# Altium PCB PCB2.PcbDoc
Units mil, origin at the board's own origin, x right, y up, seen from the top; angles counter-clockwise.
Board outline 6000 x 4000 mil, 6 copper layers (Top Layer, Layer 1, Layer 2, Layer 3, Layer 4, Bottom Layer), stack 32.112 mil thick; 144 components, 95 nets, 616 pads, 26 vias.
Unrouted connection lines stored in the file: 353.
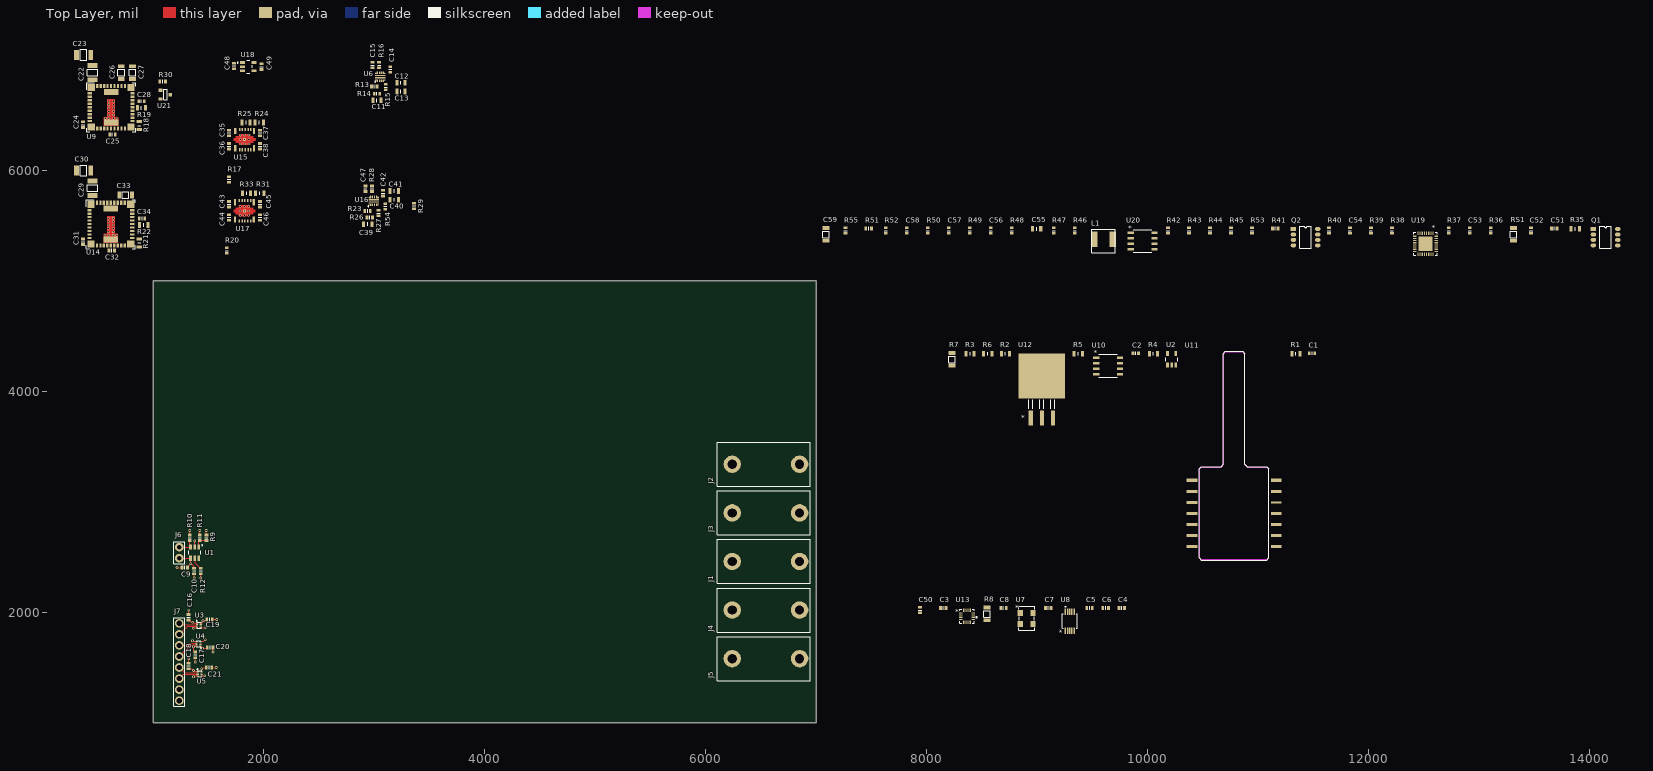
[diagram p0: Top Layer view]
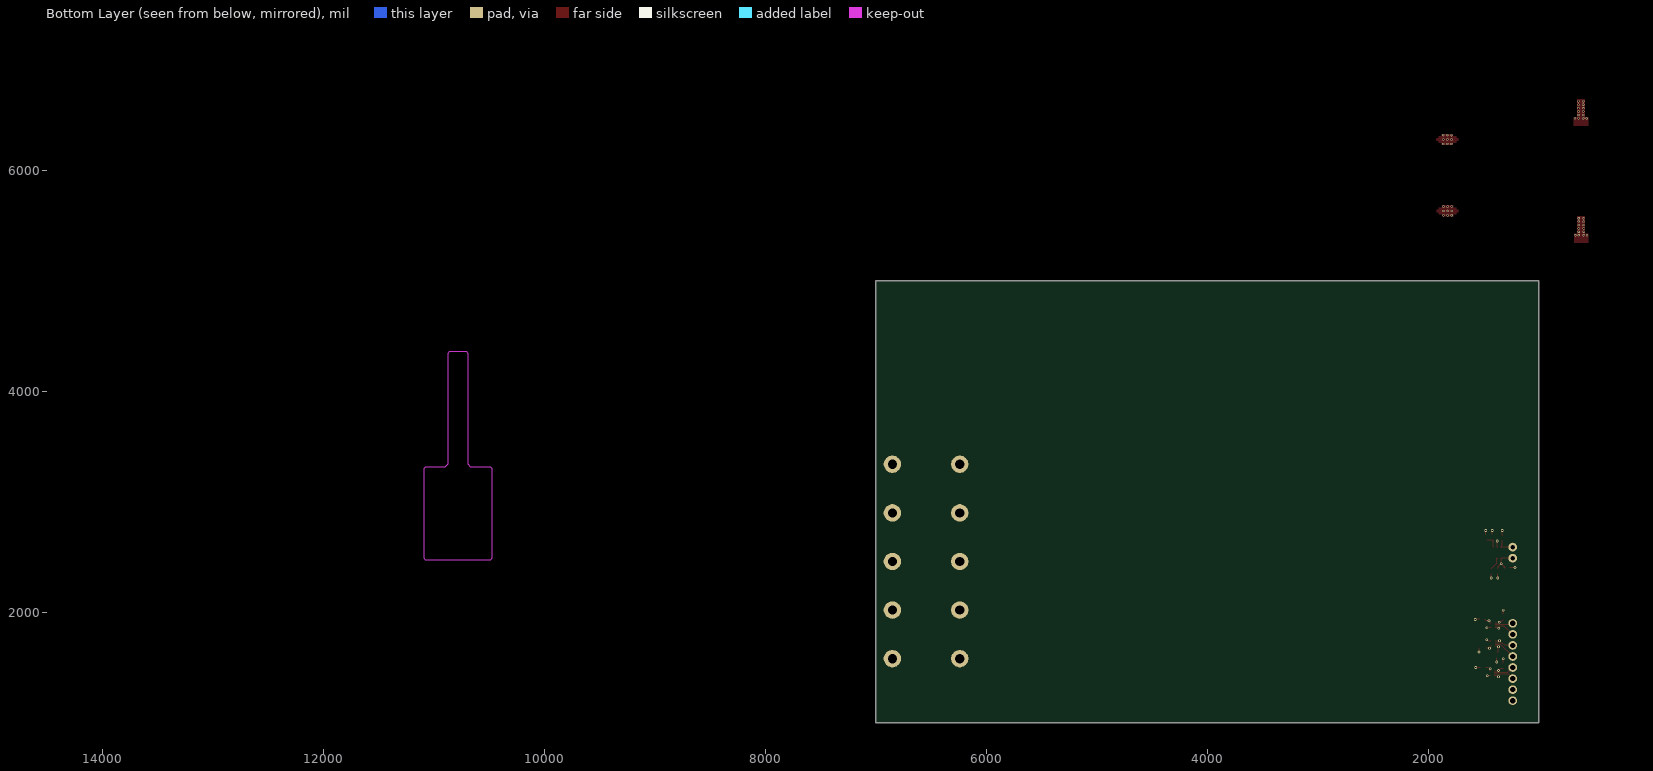
[diagram p1: Bottom Layer view, seen from below]
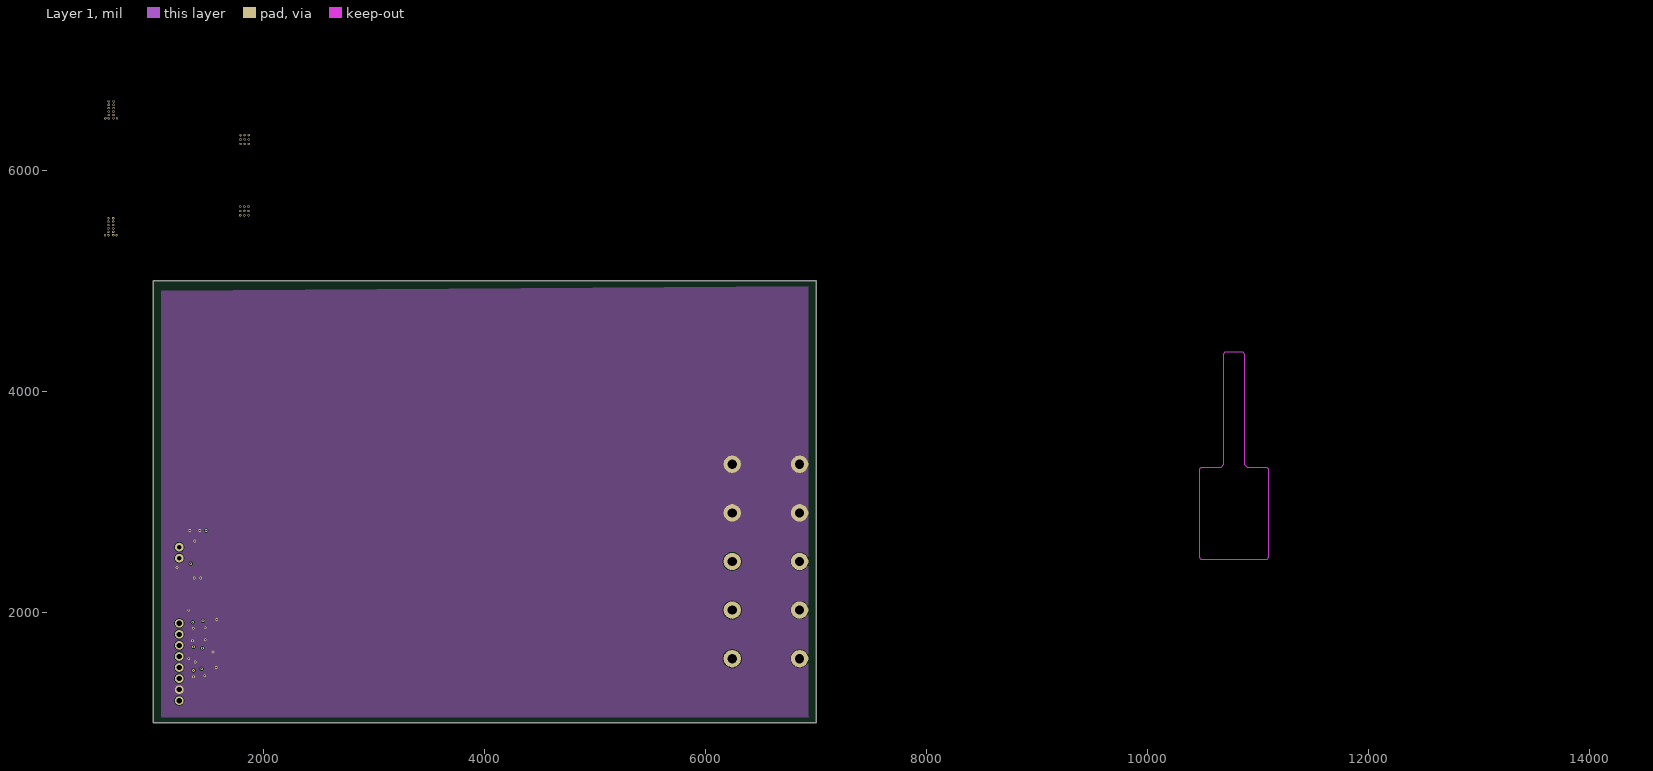
[diagram p2: Layer 1]
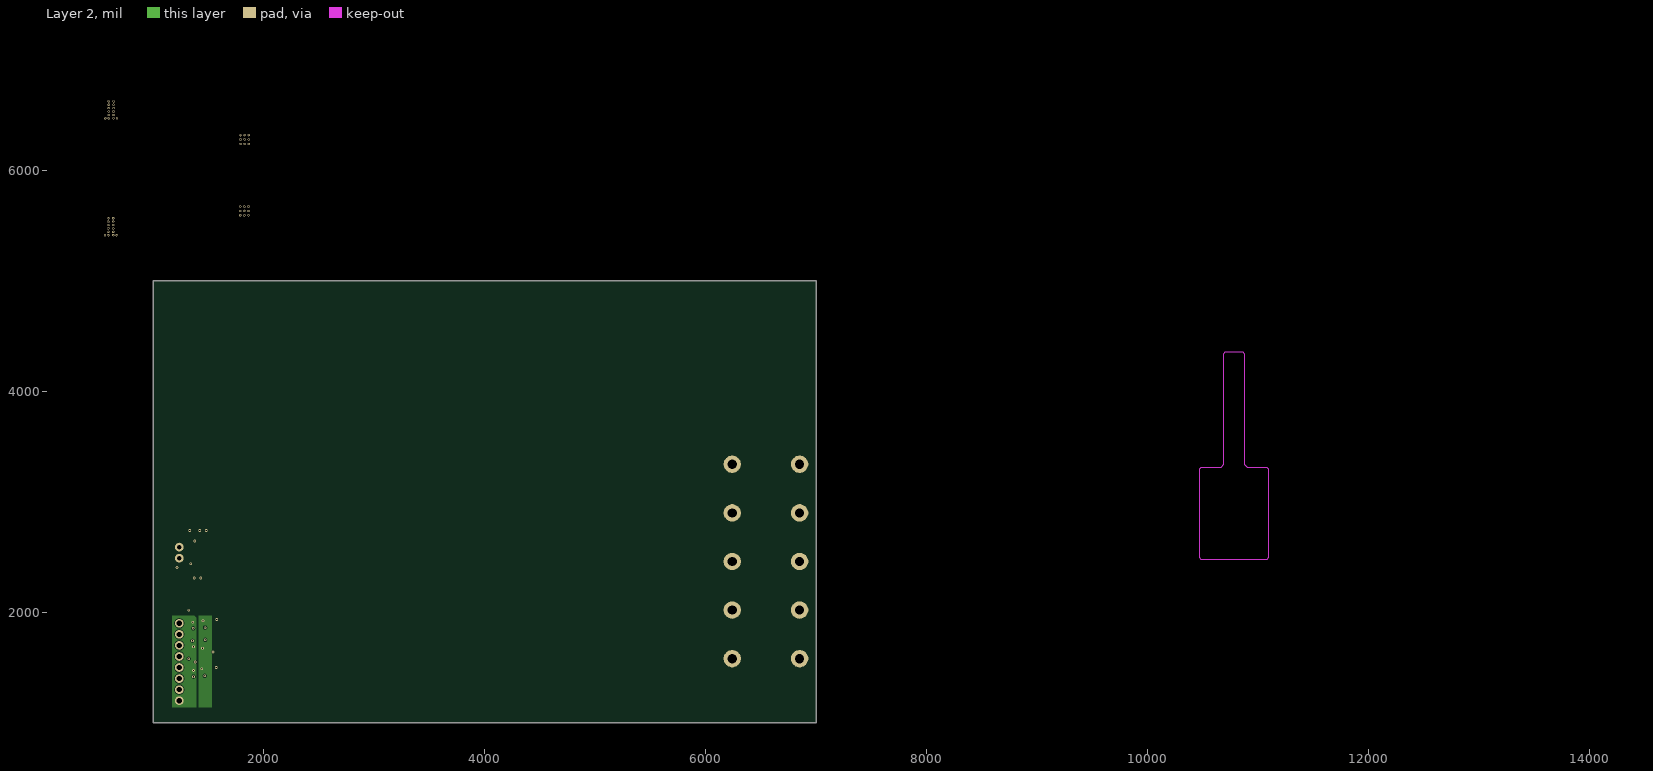
[diagram p3: Layer 2]
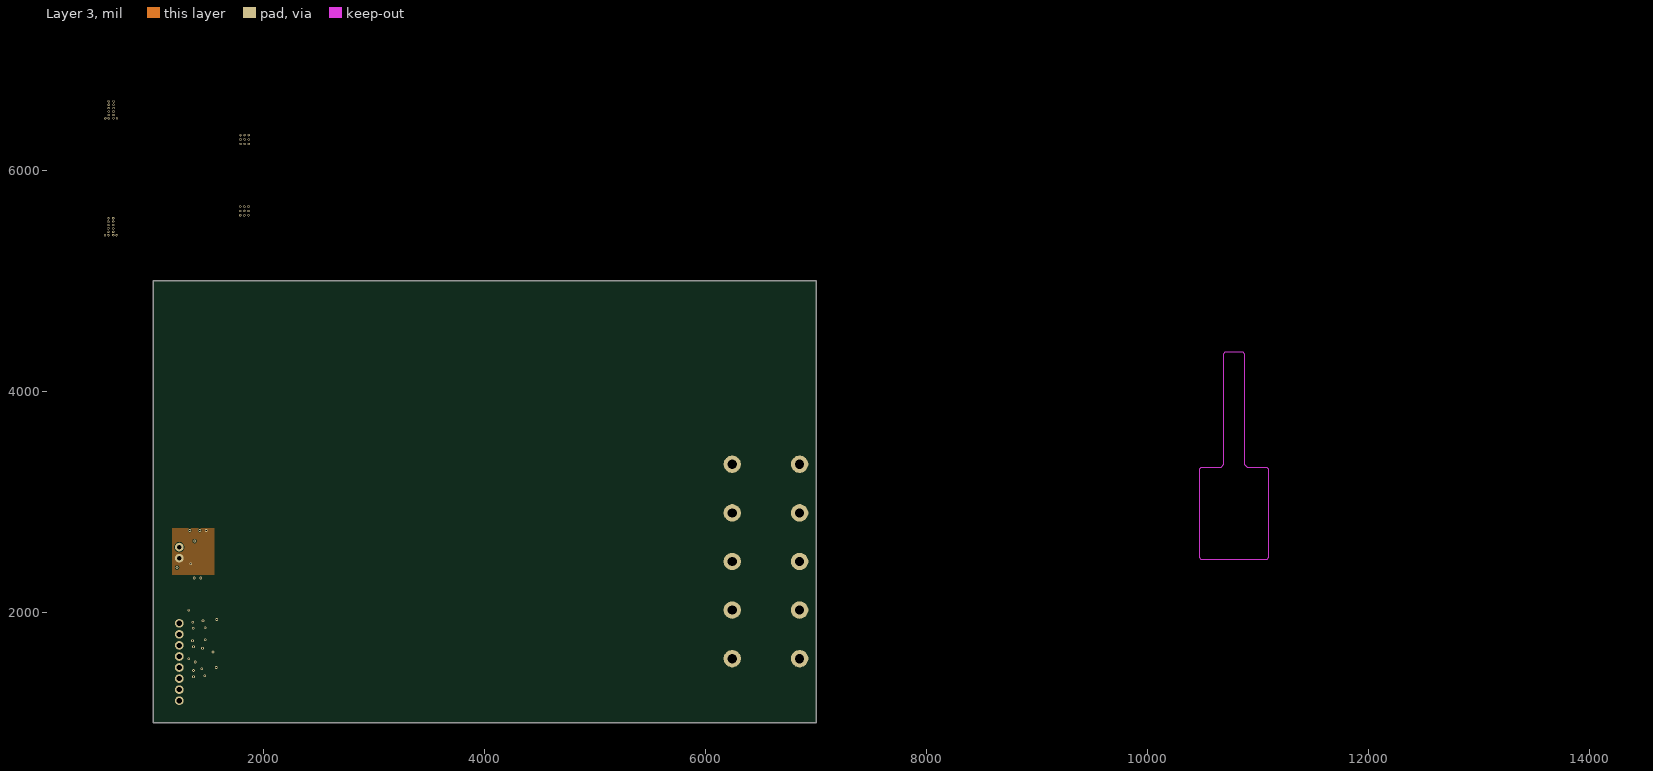
[diagram p4: Layer 3]

## Layer stack, top to bottom
Top Solder: solder mask 0.4, Solder Resist, Dk 3.5
Top Layer: signal copper 1.4
Dielectric 1: prepreg 2.8, PP-006, Dk 4.1
Layer 1: signal copper 1.378
Dielectric 2: prepreg 2.8, PP-006, Dk 4.1
Layer 2: signal copper 1.378
Dielectric 3: dielectric 12.6, FR-4, Dk 4.8
Layer 3: signal copper 1.378
Dielectric 4: prepreg 2.8, PP-006, Dk 4.1
Layer 4: signal copper 1.378
Dielectric 5: prepreg 2.8, PP-006, Dk 4.1
Bottom Layer: signal copper 1.4
Bottom Solder: solder mask 0.4, Solder Resist, Dk 3.5

## Board outline
1000,1000 7000,1000 7000,5000 1000,5000

## Design rules (kind name [scope] priority, off if disabled: settings)
Clearance [All] p1: gap=6 ignorepadtopadclearanceinfootprint=TRUE
HoleSize [All] p1: absolutevalues=TRUE maxlimit=100 minlimit=11.81 maxpercent=80.000 minpercent=20.000
PolygonConnect [All] p1: connectstyle=Direct reliefconductorwidth=10 reliefentries=4 polygonreliefangle="90 Angle" airgapwidth=10
RoomDefinition Connectors [InComponentClass('Connectors')] p1: confinementstyle=ConfineIn formatcopy=TRUE lockcomponents=FALSE outline 725.12,670 7125.12,670 7125.12,3640 725.12,3640
RoomDefinition Power [InComponentClass('Power')] p2: confinementstyle=ConfineIn formatcopy=TRUE lockcomponents=FALSE outline 39.53,5153.23 3639.53,5153.23 3639.53,7298.23 39.53,7298.23
RoomDefinition TECController [InComponentClass('TECController')] p3: confinementstyle=ConfineIn formatcopy=TRUE lockcomponents=FALSE outline 7045,5190 14290,5190 14290,5590 7045,5590
RoomDefinition LaserDiode [InComponentClass('LaserDiode')] p4: confinementstyle=ConfineIn formatcopy=TRUE lockcomponents=FALSE outline 8182.6,2300 11537.6,2300 11537.6,4460 8182.6,4460
RoomDefinition Control [InComponentClass('Control')] p5: confinementstyle=ConfineIn formatcopy=TRUE lockcomponents=FALSE outline 7910,1770 9825,1770 9825,2155 7910,2155
RoutingVias [All] p1: holewidth=12 width=24 viastyle="Through Hole" minholewidth=12 minwidth=24 maxholewidth=50 maxwidth=100 useviatemplates=TRUE viatemplateguid#1={191AAEB9-C5C8-47EE-9A1E-635FF2006958} viatemplatename#1=v61h30
SolderMaskExpansion [All] p1: expansion=4 istentingtop=FALSE
Width [All] p1: maxlimit=100 minlimit=6 preferedwidth=10
29 further rules are at their usual default settings.

## Classes and differential pairs
component class TECController: C51 C52 C53 C54 C55 C56 C57 C58 C59 L1 Q1 Q2 R35 R36 R37 R38 R39 R40 R41 R42 R43 R44 R45 R46 R47 R48 R49 R50 R51 R52 R53 R55 RS1 U19 U20
component class Power: C11 C12 C13 C14 C15 C22 C23 C24 C25 C26 C27 C28 C29 C30 C31 C32 C33 C34 C35 C36 C37 C38 C39 C40 C41 C42 C43 C44 C45 C46 C47 C48 C49 R13 R14 R15 R16 R17 R18 R19 R20 R21 R22 R23 R24 R25 R26 R27 R28 R29 R30 R31 R33 R54 U6 U9 U14 U15 U16 U17 U18 U21
component class LaserDiode: C1 C2 R1 R2 R3 R4 R5 R6 R7 U2 U10 U11 U12
component class Control: C3 C4 C5 C6 C7 C8 C50 R8 U7 U8 U13
component class Connectors: C9 C10 C16 C17 C18 C19 C20 C21 J1 J2 J3 J4 J5 J6 J7 R9 R10 R11 R12 U1 U3 U4 U5

## Components (designator, comment, footprint, x,y, rotation, side; value= is the part's Value field where it differs from the comment)
C1 "120pF" "0603 B" 11487.6,4345 r0 top
C2 "47pF" "0603 B" 9892.6,4345 r0 top
C3 "0.1uF" "0603 B" 8150,2040 r0 top
C4 "10uF" "0603 B" 9765,2040 r0 top
C5 "0.1uF" "0603 B" 9475,2040 r0 top
C6 "0.01uF" "0603 B" 9620,2040 r0 top
C7 "0.1uF" "0603 B" 9100,2040 r0 top
C8 "0.1uF" "0603 B" 8695,2040 r0 top
C9 "1uF" "0603 B" 1285.12,2405 r0 top
C10 "1uF" "0603 B" 1370.12,2375 r90 top
C11 "1uF" "0805 B" 3024.53,6633.23 r180 top
C12 "4.7uF" "0805 B" 3241.93,6793.23 r0 top
C13 "4.7uF" "0805 B" 3241.93,6713.23 r0 top
C14 "3.3nF" "0603 B" 3144.53,6913.23 r270 top
C15 "1nF" "0603 B" 2984.53,6953.23 r270 top
C16 "1uF" "0603 B" 1320.12,1955 r270 top
C17 "1uF" "0603 B" 1380.12,1615 r90 top
C18 "1uF" "0603 B" 1320.12,1515 r270 top
C19 "1uF" "0603 B" 1510.12,1935 r180 top
C20 "1uF" "0603 B" 1515,1680 r180 top
C21 "1uF" "0603 B" 1505,1500 r180 top
C22 "22uF" 1210 450,6885 r270 top
C23 "22uF" 1210 370,7045 r180 top
C24 "100nF" "0603 B" 364.53,6413.23 r270 top
C25 "100nF" "0603 B" 630,6325 r180 top
C26 "100uF" "1206 B" 710,6885 r270 top
C27 "100uF" "1206 B" 810,6885 r270 top
C28 "33nF" "0603 B" 893.31,6625 r180 top
C29 "22uF" 1210 449.53,5838.23 r270 top
C30 "22uF" 1210 369.53,5998.23 r180 top
C31 "100nF" "0603 B" 364.53,5353.23 r270 top
C32 "100nF" "0603 B" 624.53,5273.23 r180 top
C33 "100uF" "1206 B" 749.53,5778.23 r180 top
C34 "33nF" "0603 B" 898.31,5565 r180 top
C35 "10uF" "0603 B" 1684.53,6338.23 r90 top
C36 "10uF" "0603 B" 1684.53,6218.23 r270 top
C37 "47uF" "0603 B" 1964.53,6338.23 r90 top
C38 "47uF" "0603 B" 1964.53,6218.23 r270 top
C39 "1uF" "0805 B" 2941.93,5513.23 r180 top
C40 "4.7uF" "0805 B" 3181.93,5733.23 r0 top
C41 "4.7uF" "0805 B" 3181.93,5813.23 r0 top
C42 "18nF" "0603 B" 3079.33,5793.23 r270 top
C43 "10uF" "0603 B" 1684.53,5693.23 r90 top
C44 "10uF" "0603 B" 1684.53,5573.23 r270 top
C45 "47uF" "0603 B" 1964.53,5693.23 r90 top
C46 "47uF" "0603 B" 1964.53,5573.23 r270 top
C47 "1nF" "0603 B" 2919.33,5833.23 r270 top
C48 "1uF" "0603 B" 1730,6945 r90 top
C49 "1uF" "0603 B" 1979.53,6938.23 r90 top
C50 "0.1uF" "0603 B" 7940,2020 r90 top
C51 "100nF" "0603 B" 13680,5475 r0 top
C52 "100nF" "0603 B" 13470,5455 r90 top
C53 "100nF" "0603 B" 12915,5455 r90 top
C54 "100nF" "0603 B" 11830,5455 r90 top
C55 "47uF" "0805 B" 8995,5470 r0 top
C56 "4.7nF" "0603 B" 8580,5455 r90 top
C57 "100pF" "0603 B" 8200,5455 r90 top
C58 "100nF" "0603 B" 7820,5455 r90 top
C59 "68uF" "1206 B" 7090,5420 r90 top
J1 "24.243.1" "BANANA RD" 6545.12,2460 r0 top
J2 "24.243.2" "BANANA BK" 6545.12,3340 r0 top
J3 "24.243.2" "BANANA BK" 6545.12,2900 r0 top
J4 "24.243.3" "BANANA YL" 6545.12,2020 r0 top
J5 "24.243.5" "BANANA BU" 6545.12,1580 r0 top
J6 "SIL02" SIL02 1235.12,2540 r270 top
J7 "SIL08" SIL08 1235.12,1550 r90 top
L1 "3.3uH" SRP0520 9600,5360 r0 top
Q1 "FDS8960C" SO-8 14145,5395 r0 top
Q2 "FDS8960C" SO-8 11430,5395 r0 top
R1 "124" 0805 11342.6,4340 r0 top
R2 "62K" 0805 8712.6,4340 r0 top
R3 "3.9K" 0805 8392.6,4340 r0 top
R4 "1k" 0805 10052.6,4340 r0 top
R5 "10" 0805 9372.6,4340 r0 top
R6 "10k" 0805 8552.6,4340 r0 top
R7 "0.025" 1206 8227.6,4290 r90 top
R8 "22" 1206 8545,1985 r90 top
R9 "18k" 0603 1480.06,2674.94 r90 top
R10 "18k" 0603 1330.12,2675 r270 top
R11 "174k" 0603 1420.06,2674.94 r90 top
R12 "18k" 0603 1430.12,2375 r90 top
R13 "174k" 0603 2999.53,6758.23 r180 top
R14 "3k3" 0603 3024.53,6693.23 r0 top
R15 "18k" 0603 3104.53,6753.23 r90 top
R16 "820R" 0603 3044.53,6953.23 r90 top
R17 "0" 0603 1684.53,5918.23 r90 top
R18 "169k" 0805 873.31,6405 r270 top
R19 "536" 0805 893.31,6565 r0 top
R20 "0" 0603 1664.53,5273.23 r90 top
R21 "63.4k" 0805 873.31,5342.4 r270 top
R22 "196" 0805 913.31,5505 r0 top
R23 "6.2k" 0603 2939.33,5633.23 r180 top
R24 "10k" 0805 1959.53,6433.23 r180 top
R25 "2.5k" 0805 1839.53,6433.23 r180 top
R26 "10k" 0603 2959.33,5573.23 r0 top
R27 "15k" 0603 3039.33,5613.23 r270 top
R28 "530" 0603 2979.33,5833.23 r90 top
R29 "10k" 0603 3359.53,5678.23 r270 top
R30 "10k" 0603 1085,6805 r0 top
R31 "10k" 0805 1964.53,5793.23 r180 top
R33 "2.32k" 0805 1844.53,5793.23 r180 top
R35 "5" 0805 13870,5470 r0 top
R36 "3k" 0603 13105,5455 r90 top value=6k
R37 "2k" 0603 12725,5455 r90 top value=4k
R38 "1k" 0603 12210,5455 r90 top
R39 "9k" 0603 12020,5455 r90 top
R40 "10k" 0603 11640,5455 r90 top
R41 "10k" 0603 11155,5475 r0 top
R42 "30k" 0603 10185,5455 r90 top
R43 "510" 0603 10375,5455 r90 top
R44 "20k" 0603 10565,5455 r90 top
R45 "20k" 0603 10755,5455 r90 top
R46 "1k" 0603 9340,5455 r90 top
R47 "510" 0603 9150,5455 r90 top
R48 "4.75k" 0603 8770,5455 r90 top
R49 "249 kΩ" 0603 8390,5455 r90 top value=249k
R50 "30k" 0603 8010,5455 r90 top
R51 "6.8k" 0603 7475,5475 r0 top
R52 "10k" 0603 7630,5455 r90 top
R53 "10k" 0603 10945,5455 r90 top
R54 "100k" 0603 3099.33,5673.23 r270 top
R55 "100k" 0603 7265,5455 r90 top
RS1 "0.01" 1206 13310,5420 r90 top
U1 "LT1719 SOT" TSOT-23-6 1375.12,2540 r180 top
U2 "AD8031" TSOT-23-5 10217.6,4290 r0 top
U3 "SN74AVC2T244" "X2SON 8" 1412.4,1881.89 r270 top
U4 "SN74AVC2T244" "X2SON 8" 1410.12,1715 r90 top
U5 "SN74AVC2T244" "X2SON 8" 1420.12,1445 r270 top
U6 "TPS259470L" "VQFN-HR 2x2" 3054.72,6848.07 r90 top
U7 "7C-25.000MCB-T" OSC_TXC_7C_TXC 8905,1945 r0 top
U8 "AD9833BRMZ" RM_10_ADI 9295,1920 r90 top
U9 "LMZ31707RVQT" RVQ0042A 618.5,6571.1 r0 top value=Value
U10 "LT1677CS8#PBF" SO-8_S_LIT 9642.6,4230 r0 top
U11 "EM33X" "GH High Power DFB Laser AA1401" 10782.6,2895 r90 top
U12 "CSD18511KTT" ktt3_TEX 9042.6,4140 r0 top
U13 "AD5592RBCPZ-1-RL7" CP_16_32_ADI 8365,1965 r0 top
U14 "LMZ31707RVQT" RVQ0042A 615.45,5513.27 r0 top value=Value
U15 "TPSM53603RDAR" RDA0015A 1826.93,6278.86 r90 top value=Value
U16 "TPS259470L" "VQFN-HR 2x2" 2994.53,5723.07 r90 top
U17 "TPSM53603RDAR" RDA0015A 1824.53,5632.6 r90 top value=Value
U18 "TPS7A0533PDBVT" DBV0005A-MFG 1859.53,6938.23 r0 top value=Value
U19 "ADN8831ACPZ-REEL7" CP_32_7_ADI 12515,5335 r0 top
U20 "LT1677CS8#PBF" SO-8_S_LIT 9955,5360 r0 top
U21 "DMN3150L" SOT-23 1110,6685 r0 top

## Footprints (in the part's own frame and the unit in brackets; to place one, negate y for a bottom-side part, rotate by r counter-clockwise, add the part's x,y. Pads: shape width x height; smd on the part's side, far side on the other; paste and mask are expansions set on the pad)
0603 [mil] "SMD 0603"
  rect 24x35 smd: 1(-25,0) 2(25,0)
  silkscreen extent 0,-15 0,15, body extent -31,-16 31,16, height 18
"0603 B" [mil] "SMD 0603 blue"
  rect 24x35 smd: 1(-25,0) 2(25,0)
  silkscreen extent 0,-15 0,15, body extent -31,-16 31,16, height 18
0805 [mm] "SMD 0805"
  rect 0.7x1.3 smd: 1(-0.95,0) 2(0.95,0)
  silkscreen extent 0,-0.38 0,0.38, body extent -1,-0.6 1,0.6, height 1.1
"0805 B" [mm] "SMD 0805 blue"
  rect 0.7x1.3 smd: 1(-0.95,0) 2(0.95,0)
  silkscreen extent 0,-0.38 0,0.38, body extent -1,-0.6 1,0.6, height 1.25
1206 [mil] "SMD 1206"
  rect 35x63 smd: 1(-57,0) 2(57,0)
  silkscreen extent -30,-30 30,30, body extent -60,-30 60,30, height 18
"1206 B" [mil] "SMD 1206"
  rect 35x63 smd: 1(-57,0) 2(57,0)
  silkscreen extent -30,-30 30,30, body extent -60,-30 60,30, height 45
1210 [mm] "SMD 1210"
  rect 1.1x2.3 smd: 1(-1.65,0) 2(1.65,0)
  silkscreen extent -0.75,-1.25 0.75,1.25, body extent -1.6,-1.25 1.6,1.25, height 1.3
"BANANA BK" [mm] "Multicomp 24.243.2"
  round 4 hole 2.1: 1(-7.75,0) 1(7.75,0)
  silkscreen extent -11.25,-5.05 10.15,5.05, body extent -11.25,-5.05 12.75,5.05, height 13
"BANANA BU" [mm] "Multicomp 24.243.5"
  round 4 hole 2.1: 1(-7.75,0) 1(7.75,0)
  silkscreen extent -11.25,-5.05 10.15,5.05, body extent -11.25,-5.05 12.75,5.05, height 13
"BANANA RD" [mm] "Multicomp 24.243.1"
  round 4 hole 2.1: 1(-7.75,0) 1(7.75,0)
  silkscreen extent -11.25,-5.05 10.15,5.05, body extent -11.25,-5.05 12.75,5.05, height 13
"BANANA YL" [mm] "Multicomp 24.243.3"
  round 4 hole 2.1: 1(-7.75,0) 1(7.75,0)
  silkscreen extent -11.25,-5.05 10.15,5.05, body extent -11.25,-5.05 12.75,5.05, height 13
CP_16_32_ADI [mm]
  rect 0.805x0.249 smd paste+0 mask+0: 1(-1.402,0.75) 2(-1.402,0.25) 3(-1.402,-0.25) 4(-1.402,-0.75) 9(1.402,-0.75) 10(1.402,-0.25) 11(1.402,0.25) 12(1.402,0.75)
  rect 0.249x0.805 smd paste+0 mask+0: 5(-0.75,-1.402) 6(-0.25,-1.402) 7(0.25,-1.402) 8(0.75,-1.402) 13(0.75,1.402) 14(0.25,1.402) 15(-0.25,1.402) 16(-0.75,1.402)
  silkscreen extent -1.63,-1.63 2.31,1.63, body extent -1.5,-1.5 1.5,1.5, height 0.89
CP_32_7_ADI [mm]
  rect 0.275x0.805 smd paste+0 mask+0: 1(1.75,2.452) 2(1.25,2.452) 3(0.75,2.452) 4(0.25,2.452) 5(-0.25,2.452) 6(-0.75,2.452) 7(-1.25,2.452) 8(-1.75,2.452) 17(-1.75,-2.452) 18(-1.25,-2.452) 19(-0.75,-2.452) 20(-0.25,-2.452) 21(0.25,-2.452) 22(0.75,-2.452) 23(1.25,-2.452) 24(1.75,-2.452)
  rect 0.805x0.275 smd paste+0 mask+0: 9(-2.452,1.75) 10(-2.452,1.25) 11(-2.452,0.75) 12(-2.452,0.25) 13(-2.452,-0.25) 14(-2.452,-0.75) 15(-2.452,-1.25) 16(-2.452,-1.75) 25(2.452,-1.75) 26(2.452,-1.25) 27(2.452,-0.75) 28(2.452,-0.25) 29(2.452,0.25) 30(2.452,0.75) 31(2.452,1.25) 32(2.452,1.75)
  rect 3.25x3.25 smd paste+0 mask+0: HTAB(0,0)
  silkscreen extent -2.68,-2.68 2.68,2.68, body extent -2.55,-2.55 2.55,2.55, height 0.8
DBV0005A-MFG [mm]
  rect 1.1x0.6 smd paste+0 mask+0: 1(-1.3,0.95) 2(-1.3,0) 3(-1.3,-0.95) 4(1.3,-0.95) 5(1.3,0.95)
  silkscreen extent -2.57,-1.53 0.87,1.53, body extent -1.4,-1.45 1.4,1.45, height 1.2
"GH High Power DFB Laser AA1401" [mm] "Laser Pulser"
  rect 0.7x2.5 smd: 1(7.62,9.675) 2(5.08,9.675) 3(2.54,9.675) 4(0,9.675) 5(-2.54,9.675) 6(-5.08,9.675) 7(-7.62,9.675) 8(-7.62,-9.675) 9(-5.08,-9.675) 10(-2.54,-9.675) 11(0,-9.675) 13(5.08,-9.675) 14(7.62,-9.675)
  rect 0.5x2.5 smd: 12(2.54,-9.675)
  Keep-Out Layer board cut-out: 10.25,7.875 10.625,7.5 10.625,3 11.25,2.375 36.75,2.375 37.125,2 37.125,-2 36.75,-2.375 11.25,-2.375 10.625,-3 10.625,-7.5 10.25,-7.875 -10.25,-7.875 -10.625,-7.5 -10.625,7.5 -10.25,7.875
  Multi-Layer pour cut-out: -10.375,8.125 -10.75,7.75 -10.875,7.625 -10.875,-7.625 -10.375,-8.125 10.375,-8.125 10.875,-7.625 10.875,-3.125 11.375,-2.625 23.125,-2.625 36.875,-2.625 37.375,-2.125 37.375,2.125 36.875,2.625 11.375,2.625 10.875,3.125 10.875,7.625 10.375,8.125
  silkscreen extent -10.75,-8 37.25,8, body extent -14.97,-11.52 37.23,11.58, height 4.04
ktt3_TEX [mil]
  rect 38x138 smd paste+0 mask+0: 1(-100,-381) 2(0,-381) 3(100,-381)
  rect 422x408 smd paste+0 mask+0: 4(0,0)
  silkscreen extent -118,-298 118,-217, body extent -210,-293 210,190, height 67
OSC_TXC_7C_TXC [mm]
  rect 1.2x1.4 smd paste+0 mask+0: 1(-1.473,1.27) 2(-1.473,-1.27) 3(1.473,-1.27) 4(1.473,1.27)
  silkscreen extent -1.83,-2.73 1.83,2.73, body extent 0,0 0.25,0.25, height 0.25
RDA0015A [mm]
  rect 1.4x0.5 smd paste+0 mask+0.051: 1(-2,2.15) 7(-2,-2.15) 8(2,-2.15) 14(2,2.15)
  rect 0.7x0.35 smd paste+0 mask+0.051: 2(-2.35,1.175) 3(-2.35,0.525) 4(-2.35,-0.125) 5(-2.35,-0.775) 6(-2.35,-1.425) 9(2.35,-1.425) 10(2.35,-0.775) 11(2.35,-0.125) 12(2.35,0.525) 13(2.35,1.175)
  rect 0.7x0.7 smd paste-0.337 mask+0.051: 15(0,0)
  round 0.5 hole 0.203 mask+0.051: 16(-1,0) 17(1,0) 18(0.025,0) 19(0,0.95) 20(1,0.95) 21(-1,0.95) 22(0,-0.95) 23(1,-0.95) 24(-1,-0.95)
  Top Layer region: -1.25,-1.2 -1.2,-1.25 -0.8,-1.25 -0.75,-1.3 -0.75,-1.95 -0.7,-2 -0.3,-2 -0.25,-2.05 -0.25,-2.449 -0.2,-2.499 0.2,-2.499 0.25,-2.449 0.25,-2.05 0.3,-2 0.7,-2 0.75,-1.95 0.75,-1.3 0.8,-1.25 1.2,-1.25 1.25,-1.2 1.25,1.2 1.2,1.25 0.8,1.25 0.75,1.3 0.75,1.95 0.7,2 0.3,2 0.25,2.05 0.25,2.449 0.2,2.499 -0.2,2.499 -0.25,2.449 -0.25,2.05 -0.3,2 -0.7,2 -0.75,1.95 -0.75,1.3 -0.8,1.25 -1.2,1.25 -1.25,1.2
  body extent -2.47,-2.75 2.53,2.75, height 4.1
RM_10_ADI [mil]
  rect 59.56x13 smd paste+0 mask+0: 1(-85.5,39.37) 2(-85.5,19.68) 3(-85.5,0) 4(-85.5,-19.68) 5(-85.5,-39.37) 6(85.5,-39.37) 7(85.5,-19.68) 8(85.5,0) 9(85.5,19.68) 10(85.5,39.37)
  silkscreen extent -66,-66 135,66, body extent -101,-61 101,61, height 43
RVQ0042A [mm]
  rect 1.65x1.65 smd paste-0.225 mask+0.051: 1(-4.575,4.575) 11(-4.575,-4.575) 21(4.575,-4.575) 31(4.575,4.575)
  rect 0.95x0.5 smd paste-0.025 mask+0.051: 2(-4.925,3.2) 3(-4.925,2.4) 4(-4.925,1.6) 5(-4.925,0.8) 6(-4.925,0) 7(-4.925,-0.8) 8(-4.925,-1.6) 9(-4.925,-2.4) 10(-4.925,-3.2) 22(4.925,-3.2) 23(4.925,-2.4) 24(4.925,-1.6) 25(4.925,-0.8) 26(4.925,0) 27(4.925,0.8) 28(4.925,1.6) 29(4.925,2.4) 30(4.925,3.2)
  rect 0.5x0.95 smd paste-0.025 mask+0.051: 12(-3.2,-4.925) 13(-2.4,-4.925) 14(-1.6,-4.925) 15(-0.8,-4.925) 16(0,-4.925) 17(0.8,-4.925) 18(1.6,-4.925) 19(2.4,-4.925) 20(3.2,-4.925) 32(3.2,4.925) 33(2.4,4.925) 34(1.6,4.925) 35(0.8,4.925) 36(0,4.925) 37(-0.8,4.925) 38(-1.6,4.925) 39(-2.4,4.925) 40(-3.2,4.925)
  rect 3.29x1.4 smd paste-1.632 mask+0.051: 41(0,3.55)
  rect 3.29x1.4 smd paste-1.632 mask+0: 42(0,-3.55)
  round 0.5 hole 0.305 mask-0.152: V(-1.342,-2.55) V(-0.563,-2.55) V(-0.563,-1.77) V(-0.563,-0.99) V(-0.563,-0.21) V(-0.563,0.57) V(-0.563,1.35) V(0.563,-2.55) V(0.563,-1.77) V(0.563,-0.99) V(0.563,-0.21) V(0.563,0.57) V(0.563,1.35) V(1.342,-2.55)
  Top Layer region: -1.645,-4.25 -1.645,-4.25 -1.645,-2.25 -0.863,-2.25 -0.863,1.8 0.863,1.8 0.863,-2.25 1.645,-2.25 1.645,-4.25
  silkscreen extent -5.65,-5.65 5.65,5.65, body extent -5,-5 5,5, height 4.2
SIL02 [mm] "1x2 2.54mm header"
  round 2 hole 1.02: 1(-1.27,0) 2(1.27,0)
  silkscreen extent -2.54,-1.27 2.54,1.27, body extent -2.54,-1.27 2.54,1.27, height 8.38
SIL08 [mm] "8x1 2.54mm header"
  round 2 hole 1.2: 1(-8.89,0) 2(-6.35,0) 3(-3.81,0) 4(-1.27,0) 5(1.27,0) 6(3.81,0) 7(6.35,0) 8(8.89,0)
  silkscreen extent -10.16,-1.27 10.16,1.27, body extent -10.16,-1.27 10.16,1.27, height 8.38
SO-8 [mm] "SO-8 large pads"
  rect 1.27x0.89 smd: 1(-2.8,1.875)
  oval 1.27x0.89 smd: 2(-2.8,0.623) 3(-2.8,-0.629) 4(-2.8,-1.881) 5(2.8,-1.881) 6(2.8,-0.629) 7(2.8,0.623) 8(2.8,1.875)
  silkscreen extent -1.33,-2.51 1.33,2.5, body extent -3,-2.45 3,2.45, height 1.7
SO-8_S_LIT [mil]
  rect 57.28x20.97 smd paste+0 mask+0: 1(-107.14,75) 2(-107.14,25) 3(-107.14,-25) 4(-107.14,-75) 5(107.14,-75) 6(107.14,-25) 7(107.14,25) 8(107.14,75)
  silkscreen extent -84,-104 84,104, body extent -122,-99 122,99, height 69
SOT-23 [mm] "SOT-23 made for BAR66E6327"
  rect 0.9x0.8 smd: 1(-1.1,1) 2(-1.1,-1) 3(1.1,0)
  silkscreen extent -0.4,-1.22 0.4,1.22, body extent -1.4,-1.45 1.4,1.45, height 1
SRP0520 [mm] "Bourns SRP0520 series"
  rect 1.5x3.5 smd: 1(-2.15,0.39) 2(2.15,0.39)
  silkscreen extent -2.7,-2.7 2.7,2.7, body extent -2.55,-2.7 2.55,2.4, height 2
TSOT-23-5 [mm] "TSOT-23-5"
  rect 0.62x1.22 smd: 1(-0.95,-1.31) 2(0,-1.3) 3(0.95,-1.31) 4(0.95,1.31) 5(-0.95,1.31)
  silkscreen extent -1.4,-0.4 1.4,0.4, body extent -1.45,-1.6 1.45,1.6, height 0.94
TSOT-23-6 [mm] "TSOT-23-6"
  rect 0.62x1.22 smd: 1(-0.95,-1.31) 2(0,-1.3) 3(0.95,-1.31) 4(0.95,1.31) 5(0,1.3) 6(-0.95,1.31)
  silkscreen extent -1.8,-1.8 1.4,0.4, body extent -1.45,-1.42 1.45,1.4, height 1
"VQFN-HR 2x2" [mm] "Texas Instrument VQFN-HR"
  rrect50% 0.6x0.275 on Top Paste paste-10 mask+0.05: 1(-0.9,0.687) 4(-0.9,-0.687) 7(0.9,-0.687) 10(0.9,0.687)
  rrect50% 0.6x0.3 smd paste-10 mask+0.05: 1(-0.9,0.7) 4(-0.9,-0.7) 7(0.9,-0.7) 10(0.9,0.7)
  rrect50% 0.25x0.65 smd paste-10 mask+0.05: 1(-0.725,0.875) 4(-0.725,-0.875) 7(0.725,-0.875) 10(0.725,0.875)
  rrect50% 0.225x0.65 on Top Paste paste-10 mask+0.05: 1(-0.713,0.875) 4(-0.713,-0.875) 7(0.713,-0.875) 10(0.713,0.875)
  rrect50% 0.6x0.25 smd mask+0.05: 2(-0.9,0.225) 3(-0.9,-0.225) 8(0.9,-0.225) 9(0.9,0.225)
  rrect50% 0.28x1.06 on Top Paste mask+0.05: 5(-0.25,0.63) 5(-0.25,-0.63) 6(0.25,0.63) 6(0.25,-0.63)
  rrect50% 0.3x2.4 smd paste-10 mask+0.05: 5(-0.25,0) 6(0.25,0)
  silkscreen extent -1.3,-1 1,1.3, body extent -1,-1 1,1, height 1
"X2SON 8" [mm] "Texas Instrument package DQE"
  rect 0.175x0.6 smd mask+0.05: 1(-0.525,-0.4)
  rect 0.175x0.5 smd mask+0.05: 2(-0.175,-0.45) 3(0.175,-0.45) 4(0.525,-0.45) 5(0.525,0.45) 6(0.175,0.45) 7(-0.175,0.45) 8(-0.525,0.45)
  silkscreen extent -1.13,-0.62 0.7,0.5, body extent -0.7,-0.5 0.7,0.5, height 0.37

## Part data
C1 C2 C3 C4 C5 C6 C7 C8 C14 C15 C24 C25 C28 C31 C32 C34 C35 C36 C37 C38 C42 C43 C44 C45 C46 C47 C48 C49 C50 C51 C52 C53 C54 C56 C57 C58: library part "CAP 0603", "603 Capacitor"
C9 C10 C16 C17 C18 C19 C20 C21: library part "CAP 0603", "603 Capacitor", Rating=X7R, Voltage=10V, Ref=C1608X7R1E105M080AB
C11 C12 C13 C39 C40 C41: library part "CAP 0805", "805 Capacitor", Voltage=35V, Type=X7R
C22 C23 C29 C30: library part "CAP 1210", "1210 Capacitor"
C26 C27 C33 C59: library part "CAP 1206", "1206 Capacitor"
C55: library part "CAP 0805", "805 Capacitor"
J1: library part "BANANA RED", "Banana jack, PCB mount right angle", Ref=24.243.1
J2 J3: library part "BANANA BLACK", "Banana jack, PCB mount right angle", Ref=24.243.2
J4: library part "BANANA YELLOW", "Banana jack, PCB mount right angle", Ref=24.243.3
J5: library part "BANANA BLUE", "Banana jack, PCB mount right angle", Ref=24.243.5
J6: "2.54mm Header 1x2", Ref="4x1 2.54MM HEADER"
J7: "2.54mm Header 1x6", Ref="4x1 2.54MM HEADER"
L1: library part "IND 3.3uH 4.8A SMD", "Bourns SRP0520 3.3uH 4.8A Inductor", Ref=IHLP3232DZER330M11
Q1 Q2: "MOSFET pair"
R1 R2 R3 R4 R5 R6 R18 R19 R21 R22 R24 R25 R31 R33 R35: library part "RES 0805", "805 Resistor"
R7 R8 RS1: library part "RES 1206", "1206 Resistor"
R9 R10 R11 R12 R13 R14 R15 R16 R17 R20 R23 R26 R27 R28 R29 R30 R36 R37 R38 R39 R40 R41 R42 R43 R44 R45 R46 R47 R48 R49 R50 R51 R52 R53 R54 R55: library part "RES 0603", "603 Resistor"
U1: "4.5ns Comparator with rail-torail output", Ref=LT1719IS6#PBF
U2: "2.7V, 800 uA, 80 MHz Rail-to-Rail I/O Amplifiers", Supplier Part Number 1=AD8031ARTZ-REEL7CT-ND, Ref=AD8031, Supplier 1=Digi-Key
U3 U4 U5: "2-bit dual-supply non-inverting bus translator", Ref=SN74AVC2T244
U6 U16: "2.7-23 V, 5.5 A, 28 mΩ True Reverse Current Blocking eFuse with Input Reverse Polarity Protection", Ref=TPS259470L
U7: "25 MHz XO (Standard) CMOS Oscillator 2.5V Enable/Disable 4-SMD, No Lead", Supplier Part Number 1=887-1442-1-ND, Built_By=EMA_UL_Team, ComponentLink1Description="New link", Copyright="Copyright (C) 2021 Accelerated Designs. All rights reserved", Manufacturer_Part_Number=7C-25.000MCB-T, RefDes=RefDes, SourceLibrary=TXC_2011-01-01_OSC_7C, Supplier 1=Digi-Key, Type=DEV, Vendor=TXC
U8: "Low Power, 12.65 mW, 2.3 V to 5.5 V, Programmable Waveform Generator", Supplier Part Number 1=AD9833BRMZ-REEL7CT-ND, Built_By=EMA_UL_Team, Copyright="Copyright (C) 2018 Accelerated Designs. All rights reserved", Manufacturer_Part_Number=AD9833BRMZ, RefDes=RefDes, SourceLibrary=Analog_2015-12-15, Supplier 1=Digi-Key, Type=DEV, Vendor="Analog Devices Inc"
U9 U14: "Non-Isolated DC/DC Converters 7A Power Module w/ 2.95V-17V Input", Manufacturer="Texas Instruments", PartNumber=LMZ31707RVQR, Supplier Part Number 1=296-37136-1-ND, Copyright="Copyright (C) 2018 Accelerated Designs. All rights reserved", RefDes=RefDes, Supplier 1=Digi-Key, Type=DEV
U10 U20: "Low Noise, Rail-to-Rail Precision Op Amp", Supplier Part Number 1=LT1677CS8#PBF-ND, Built_By=EMA_UL_Team, Copyright="Copyright (C) 2018 Accelerated Designs. All rights reserved", Manufacturer_Part_Number=LT1677CS8#PBF, RefDes=RefDes, SourceLibrary=LinearTech_2016-05-13_8, Supplier 1=Digi-Key, Type=DEV, Vendor="Linear Technology"
U11: "5W Cooled 9XX Multimode Lasers in 14-Pin Package"
U12: "40-V, N channel NexFET™ power MOSFET, single D2PAK, 2.6 mOhm", Supplier Part Number 1=296-50718-1-ND, Built_By=EMA_Jessica, Copyright="Copyright (C) 2018 Accelerated Designs. All rights reserved", Manufacturer_Part_Number=CSD18511KTT, RefDes=RefDes, SourceLibrary=TI_2019-05-10, Supplier 1=Digi-Key, Type=DEV, Vendor="Texas Instruments"
U13: "8-Channel, 12-Bit, Configurable ADC/DAC with On-Chip Reference, SPI Interface, LFCSP", Supplier Part Number 1=AD5592RBCPZ-1-RL7CT-ND, Built_By=EMA_UL_Team, Copyright="Copyright (C) 2021 Accelerated Designs. All rights reserved", Manufacturer_Part_Number=AD5592RBCPZ-1-RL7, RefDes=RefDes, SourceLibrary=Analog_2015-12-15, Supplier 1=Digi-Key, Type=DEV, Vendor="Analog Devices Inc"
U15 U17: "36-V, 3-A step-down power module in small 5.5 x 5 x 4-mm Enhanced HotRod™ QFN with simple footprint", Manufacturer="Texas Instruments", Supplier Part Number 1=296-TPSM53603RDARCT-ND, Copyright="Copyright (C) 2018 Accelerated Designs. All rights reserved", PartNumber=TPSM53603RDAR, RefDes=RefDes, Supplier 1=Digi-Key, Type=DEV
U18: "Linear Voltage Regulator IC Positive Fixed 1 Output 200mA SOT-23-5", Manufacturer="Texas Instruments", PartNumber=TPS7A2050PDBVR, Supplier Part Number 1=296-50256-1-ND, Copyright="Copyright (C) 2021 Accelerated Designs. All rights reserved", RefDes=RefDes, Supplier 1=Digi-Key, Type=DEV
U19: "A High Efficiency TEC Controller Solution", Supplier Part Number 1=ADN8831ACPZ-REEL7CT-ND, Built_By=EMA_UL_Team, Copyright="Copyright (C) 2018 Accelerated Designs. All rights reserved", Manufacturer_Part_Number=ADN8831ACPZ-REEL7, RefDes=RefDes, SourceLibrary=Analog_2015-01-06, Supplier 1=Digi-Key, Type=DEV, Vendor="Analog Devices Inc"
U21: "Power-Transistor", Ref=DMN3150L

## Via types
v1: diameter 24, hole 12, Top Layer to Bottom Layer, 26 vias

## Nets (pads, with @x,y where several pads share a name; then routed paths per layer and width w, separated by ;. In a path a pad name is that pad's centre, name@x,y a point inside that pad or via, vN(x,y) a via of type N, cw(c..) or ccw(c..) an arc to the next point about the centre after c; other vN are vias at no path point)
2V2: C26.2 C27.2 C39.2 R23.2 R54.1 U9.27 U9.34 U9.35 U9.36 U9.37 U9.38 U9.41 U16.5@2994.53,5713.23
2V2R: C40.2 C41.2 R29.1 U11.10 U16.6@2994.53,5732.91
3V3: C4.2 C5.2 C6.1 C8.2 C19.2 C20.2 C21.2 C49.2 R8.2 U2.5 U3.8 U4.1 U5.8 U7.1 U7.4 U8.2 U10.7 U18.5 U20.7 | length 205.8
  Top Layer w6: U4.1 1434.23,1694.33 1441.75,1686.81 1441.75,1678.44 v1(1445.2,1675) 1475.12,1675 ; U3.8 1436.52,1902.56 1446.56,1912.6 1446.56,1919 v1(1450,1922.44) 1476.12,1922.44 1485.12,1931.44 C19.2 ; U5.8 v1(1437.83,1487.83) 1442.71,1487.83 1454.87,1500 C21.2
"3V3 IO": C16.2 C17.2 C18.2 J7.1 U3.1 U4.8 U5.1 | length 270.2
  Top Layer w6: C18.2 1347.22,1490 v1(1364.33,1472.89) 1369.2,1472.89 1376.42,1465.67 U5.1 ; v1@1350.22,1910.22 v1(1357.44,1910.22) 1362.31,1910.22 1369.98,1902.56 U3.1 ; C17.2 1374.62,1640 1365.62,1649 1365.62,1685.82 v1(1364.33,1687.11) 1369.2,1687.11 1375.98,1693.89 1391.96,1693.89 U4.8
  Top Layer w10: C16.2 1325.62,1930 1345.39,1910.22 v1@1350.22,1910.22
5V: C9.2 C10.2 C33.2 C48.2 C51.1 C59.2 J6.2 Q1.3 R9.2 R35.2 U1.4 U14.27 U14.34 U14.35 U14.36 U14.37 U14.38 U14.41 U18.1 U18.3 U19.17 U19.18 | length 295.4
  Top Layer w10: J6.2 U1.4@1336.14,2490 ; C9.2@1310.12,2410.5 v1@1339.62,2440 ; v1@1338.86,2441.14 U1.4@1338.86,2487.28 ; v1@1342.44,2440 1364.98,2417.46 C10.2@1364.98,2404.5 ; R9.2 v1@1480.06,2740.84
  Top Layer w15: C9.2 C9.2@1310.12,2410.5 ; U1.4@1336.14,2490 U1.4 U1.4@1338.86,2487.28 ; v1@1338.86,2441.14 v1(1340,2440) ; v1@1339.62,2440 v1(1340,2440) ; v1@1342.44,2440 v1(1340,2440) ; C10.2@1364.98,2404.5 1369.48,2400 C10.2
  other v1: 1479.94,2739.94
5V3_EXT: C45.2 C46.2 J5.1 R31.1 U17.7 U17.8
5V_EXT: C37.2 C38.2 J4.1 R24.1 U15.7 U15.8
12V: C12.2 C13.2 C22.2 C23.2 C24.2 C25.2 C29.2 C30.2 C31.2 C32.2 C35.2 C36.2 C43.2 C44.2 R17.2 R20.2 U6.6@3054.72,6857.91 U9.1 U9.3 U9.11 U9.12 U9.39 U9.40 U14.1 U14.3 U14.11 U14.12 U14.39 U14.40 U15.1 U15.14 U17.1 U17.14
AGND: C3.2 C4.1 C5.1 C7.1 C8.1 C9.1 C10.1 C11.1 C12.1 C13.1 C14.1 C15.1 C16.1 C17.1 C18.1 C19.1 C20.1 C21.1 C22.1 C23.1 C24.1 C25.1 C26.1 C27.1 C28.1 C29.1 C30.1 C31.1 C32.1 C33.1 C34.1 C35.1 C36.1 C37.1 C38.1 C39.1 C40.1 C41.1 C42.1 C43.1 C44.1 C45.1 C46.1 C47.1 C48.1 C49.1 C50.1 C51.2 C52.2 C53.2 C54.1 C55.1 C56.2 C57.2 C58.1 C59.1 J2.1 J3.1 J7.2 Q1.1 Q2.1 R3.2 R6.2 R7.1 R10.1 R11.2 R12.1 R15.2 R16.2 R18.2 R19.2 R21.2 R22.2 R25.2 R27.2 R28.2 R33.2 R37.1 R39.1 R41.1 R42.1 R49.1 R51.1 R52.1 R55.1 U1.2 U2.2 U2.3 U3.4 U3.5 U4.4 U4.5 U5.4 U5.5 U6.8 U7.2 U8.4 U8.9 U9.2 U9.6 U9.20 U9.21 U9.23 U9.29 U9.31 U9.32 U9.33 U10.4 U11.4 U11.6 U11.13 U13.12 U14.2 U14.6 U14.20 U14.21 U14.23 U14.29 U14.31 U14.32 U14.33 U15.3 U15.10 U15.11 U15.12 U15.15 U16.8 U17.3 U17.10 U17.11 U17.12 U17.15 U18.2 U19.3 U19.12 U19.22 U20.4 U21.2 | length 750.4
  Top Layer w6: C18.1 v1(1320.12,1579.88) ; v1@1350,1740 1352.89,1742.89 v1(1354.33,1742.89) 1359.2,1742.89 1366.42,1735.67 U4.5 ; v1@1360,1852.78 v1(1361.22,1854) 1366.09,1854 1373.31,1861.22 U3.4 ; v1@1362.89,1417.11 v1(1364.33,1417.11) 1369.2,1417.11 1376.42,1424.33 U5.4 ; v1(1380,1550) 1380,1589.88 C17.1 ; U4.4 1454.63,1735.67 1468.96,1750 v1(1470,1750) ; U3.5 v1(1468.78,1861.22) ; U5.5 v1(1465.67,1424.33) ; C21.1 v1(1570,1500) ; C19.1 v1(1575,1935) v1@1570,1930 ; v1(1540,1640) C20.1
  Top Layer w10: v1(1215,2405) C9.1 ; C16.1 v1(1320.12,2019.88) ; R10.1@1330.06,2700.06 v1@1330.06,2739.94 ; v1(1370.12,2310.12) C10.1 ; U1.2@1374.62,2591.68 v1(1374.62,2644.88) ; R11.2 v1@1420.06,2742.82 ; v1(1430.12,2310.12) R12.1
  Top Layer w15: v1(1330,2740) v1@1330.06,2739.94 ; R10.1@1330.06,2700.06 R10.1 ; U1.2@1374.62,2591.68 U1.2
  other v1: 1419.94,2739.94
NetC1_1: C1.1 R1.1 U2.1 U13.2
NetC1_2: C1.2 R1.2 U2.4 U11.3 U11.7
NetC2_1: C2.1 R4.2 U10.2
NetC2_2: C2.2 R5.2 U10.6
NetC3_1: C3.1 R8.1 U13.1 U13.15
NetC6_2: C6.2 U8.1
NetC7_2: C7.2 U8.3
NetC14_2: C14.2 U6.7@3082.29,6883.5 U6.7@3089.18,6876.61
NetC15_2: C15.2 U6.10@3020.28,6876.61 U6.10@3027.17,6883.5
NetC28_2: C28.2 U9.28
NetC34_2: C34.2 U14.28
NetC42_2: C42.2 U16.7@3022.09,5758.5 U16.7@3028.98,5751.61
NetC47_2: C47.2 U16.10@2960.08,5751.61 U16.10@2966.97,5758.5
NetC50_2: C50.2 U13.6
NetC52_1: C52.1 R35.1 U19.9
NetC53_1: C53.1 R36.2 R38.2 R40.2 R44.2 R45.2 R53.2 U19.8
NetC54_2: C54.2 RS1.1 U11.1 U19.28
NetC55_2: C55.2 L1.1 Q2.3 U11.14 U19.23
NetC56_1: C56.1 R48.2
NetC57_1: C57.1 R48.1 U19.24
NetC58_2: C58.2 U19.14
NetJ6_1: J6.1 R10.2 U1.3 | length 164.8
  Top Layer w10: J6.1 U1.3@1336.14,2590 ; R10.2 1330.12,2610.98 U1.3@1337.72,2603.39
  Top Layer w15: U1.3@1336.14,2590 U1.3 U1.3@1337.72,2603.39
NetJ7_3: J7.3 U5.3 | length 183.1
  Top Layer w6: J7.3 1273.23,1438.11 U5.3
NetJ7_4: J7.4 U5.2 | length 187.2
  Top Layer w6: J7.4 1283.23,1451.89 U5.2
NetJ7_5: J7.5 U4.7 | length 202.1
  Top Layer w6: J7.5 1343.23,1708.11 U4.7
NetJ7_6: J7.6 U4.6 | length 166.4
  Top Layer w6: J7.6 1309.46,1700 1331.35,1721.89 U4.6
NetJ7_7: J7.7 U3.3 | length 190.6
  Top Layer w6: J7.7 1310.12,1875 U3.3
NetJ7_8: J7.8 U3.2 | length 164.2
  Top Layer w6: J7.8 1245.89,1889.22 1394.24,1889.22 U3.2
NetL1_2: L1.2 R46.2
NetQ1_2: Q1.2 U19.26
NetQ1_4: Q1.4 U19.25
NetQ1_6,5: Q1.5 Q1.6 Q1.7 Q1.8 RS1.2 U19.27
NetQ2_2: Q2.2 U19.21
NetQ2_4: Q2.4 U19.19
NetQ2_6,5: Q2.5 Q2.6 Q2.7 Q2.8
NetR2_1: R2.1 R3.1 U10.3
NetR2_2: R2.2 U8.10
NetR4_1: R4.1 R7.2 U12.3
NetR5_1: R5.1 R6.1 U12.1
NetR9_1: R9.1 R11.1 U1.1 | length 119.4
  Top Layer w10: R11.1@1410.12,2650 R9.1@1470.12,2650 ; U1.1@1411.32,2592.78 R11.1@1411.32,2648.8
  Top Layer w15: R11.1@1410.12,2650 R11.1@1411.32,2648.8 ; U1.1@1411.32,2592.78 U1.1
NetR12_2: R12.2 R30.2 U1.5 U4.3 | length 114.8
  Top Layer w10: U1.5@1379.82,2484.11 1379.82,2444.8 R12.2@1424.62,2400
  Top Layer w15: U1.5 U1.5@1379.82,2484.11 ; R12.2@1424.62,2400 R12.2
NetR13_1: R13.1 R14.1 U6.1@3020.28,6819.53 U6.1@3027.17,6812.64
NetR14_2: R14.2 R15.1 U6.2
NetR16_1: R16.1 U6.9
NetR17_1: R17.1 U15.2
NetR18_1: R18.1 U9.22
NetR19_1: R19.1 U9.26
NetR20_1: R20.1 U17.2
NetR21_1: R21.1 U14.22
NetR22_1: R22.1 U14.26
NetR23_1: R23.1 R26.1 U16.1@2960.08,5694.53 U16.1@2966.97,5687.64
NetR24_2: R24.2 R25.1 U15.9
NetR26_2: R26.2 R27.1 U16.2
NetR28_1: R28.1 U16.9
NetR29_2: R29.2 U13.10
NetR30_1: R30.1 U21.1
NetR31_2: R31.2 R33.1 U17.9
NetR36_1: R36.1 R37.2 U19.31
NetR38_1: R38.1 R39.2 U19.1
NetR40_1: R40.1 R41.2 U19.32
NetR42_2: R42.2 R43.2 U20.3
NetR43_1: R43.1 R44.1 U11.2
NetR45_1: R45.1 R47.2 R52.2
NetR46_1: R46.1 U19.20
NetR47_1: R47.1 R50.2 U20.2
NetR49_2: R49.2 U19.13
NetR50_1: R50.1 U13.8 U20.6
NetR51_2: R51.2 U11.5
NetR53_1: R53.1 U19.2
NetR54_2: R54.2 U13.9 U16.4@3022.09,5687.64 U16.4@3028.98,5694.53
NetR55_2: R55.2 U13.11 U19.16
NetU3_6: U3.6 U8.8
NetU3_7: U3.7 U13.16
NetU4_2: U4.2 U13.7
NetU5_6: U5.6 U8.6 U13.13
NetU5_7: U5.7 U8.7 U13.14
NetU7_3: U7.3 U8.5
NetU9_10: U9.10 U9.13 U9.14 U9.15 U9.16 U9.17 U9.18 U9.19 U9.42
NetU9_30: U9.30 U21.3
NetU11_9: U11.9 U11.11 U12.2
NetU13_3: U13.3 U19.5
NetU13_4: U13.4 U19.29
NetU13_5: U13.5 U19.30
NetU14_10: U14.10 U14.13 U14.14 U14.15 U14.16 U14.17 U14.18 U14.19 U14.42
NetU19_6: U19.6 U19.7
VIN: C11.2 J1.1 R13.2 U6.5@3054.72,6838.23
pads on no net: U1.6 U6.1@3020.28,6820.02 U6.1@3027.66,6812.64 U6.3 U6.4 U6.5@3029.92,6838.23 U6.5@3079.53,6838.23 U6.6@3029.92,6857.91 U6.6@3079.53,6857.91 U6.7@3081.79,6883.5 U6.7@3089.17,6876.12 U6.10@3020.28,6876.12 U6.10@3027.66,6883.5 U9.4 U9.5 U9.7 U9.8 U9.9 U9.24 U9.25 U9.V U10.1 U10.5 U10.8 U11.8 U11.12 U12.4 U14.4 U14.5 U14.7 U14.8 U14.9 U14.24 U14.25 U14.30 U14.V U15.4 U15.5 U15.6 U15.13 U15.16 U15.17 U15.18 U15.19 U15.20 U15.21 U15.22 U15.23 U15.24 U16.1@2960.08,5695.02 U16.1@2967.46,5687.64 U16.3 U16.4@3021.59,5687.64 U16.4@3028.98,5695.02 U16.5@2969.72,5713.23 U16.5@3019.33,5713.23 U16.6@2969.72,5732.91 U16.6@3019.33,5732.91 U16.7@3021.59,5758.5 U16.7@3028.98,5751.12 U16.10@2960.08,5751.12 U16.10@2967.46,5758.5 U17.4 U17.5 U17.6 U17.13 U17.16 U17.17 U17.18 U17.19 U17.20 U17.21 U17.22 U17.23 U17.24 U18.4 U19.4 U19.10 U19.11 U19.15 U19.HTAB U20.1 U20.5 U20.8

## Polygon pours and split planes (outlines as drawn)
AGND on Layer 1 "NONET_L04_P-001" (solid, pour order 0): 1070,4910 1070,1050 6940,1050 6930,1060 6930,4950
"3V3 IO" on Layer 2 "NONET_L04_P-001" (solid, pour order 2): 1170,1970 1170,1140 1390,1140 1390,1950 1370,1970
3V3 on Layer 2 "NONET_L04_P-001" (solid, pour order 3): 1410,1970 1410,1140 1530,1140 1530,1970
5V on Layer 3 "NONET_L04_P-001" (solid, pour order 5): 1170,2760 1170,2340 1550,2340 1550,2760

## Text inside footprints (layer, text, board x,y; h text height)
U7: Top Overlay "*" at 8800.5,2013.5 h50; Mechanical 13 "*" at 8850.5,1988.5 h50
U8: Top Overlay "*" at 9247.63,1812 h50 r90; Mechanical 13 "*" at 9287,1861.5 h50 r90
U10: Top Overlay "*" at 9512.96,4320.97 h50; Mechanical 13 "*" at 9566.6,4275.5 h50
U12: Top Overlay "*" at 8855.1,3734 h50; Mechanical 13 "*" at 8930.1,3935 h50
U13: Top Overlay "*" at 8256.44,1979.37 h50; Mechanical 13 "*" at 8313.13,1979.37 h50
U19: Top Overlay "*" at 12571.4,5451.55 h50; Mechanical 13 "*" at 12577.65,5413.05 h25
U20: Top Overlay "*" at 9825.36,5450.97 h50; Mechanical 13 "*" at 9879,5405.5 h50